# EAGLE board alphanewt_v0.7 (EAGLE 8.2.2)
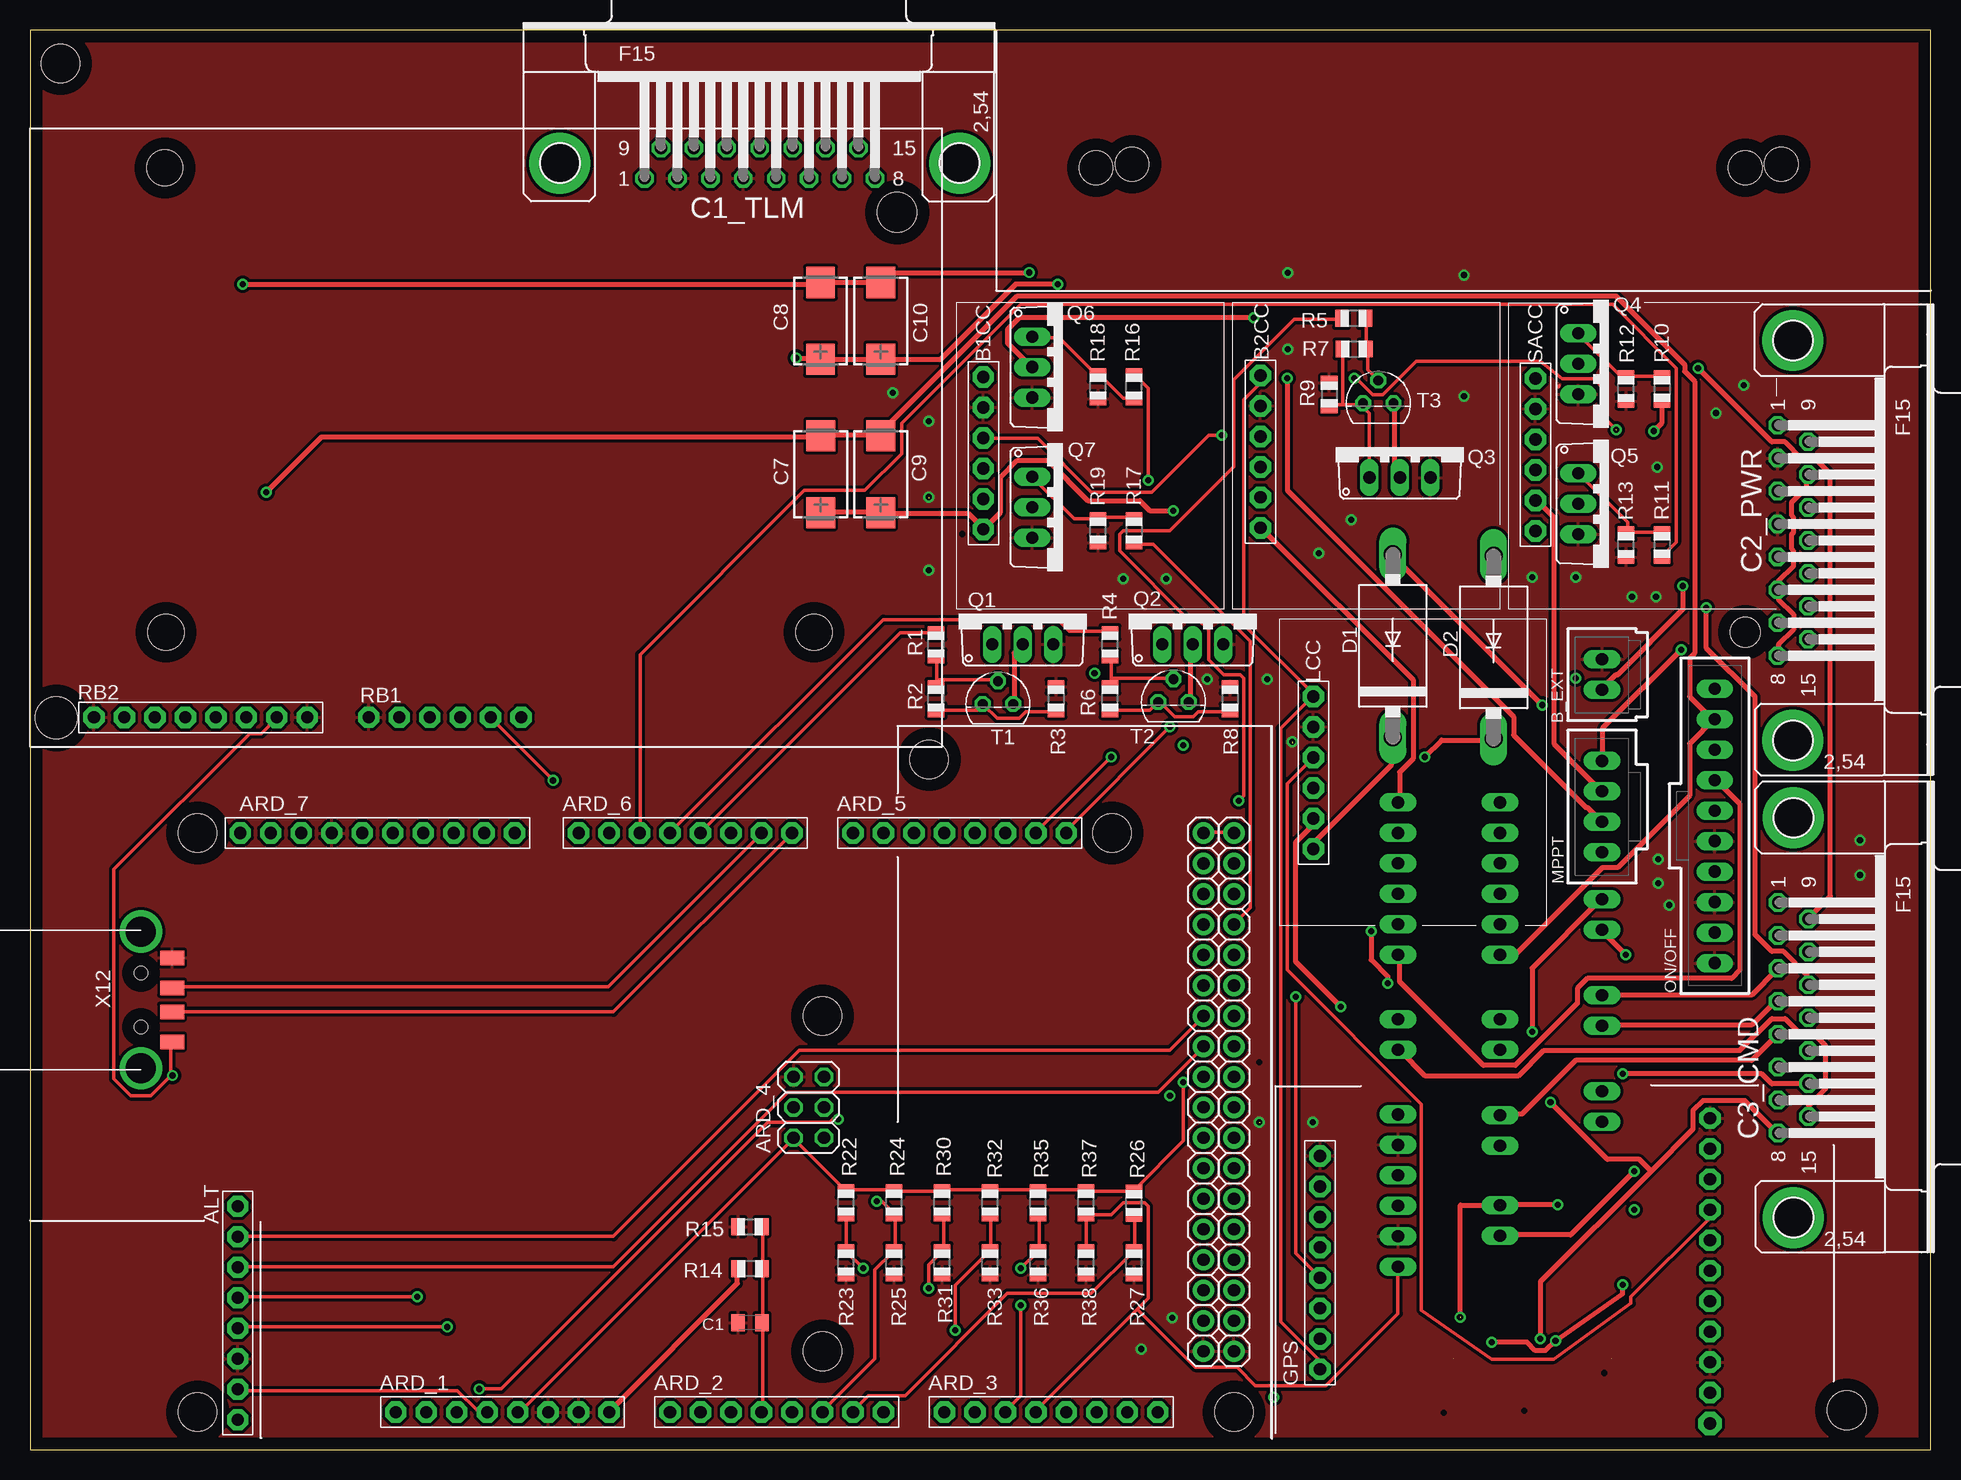
[diagram p0: board, top side]
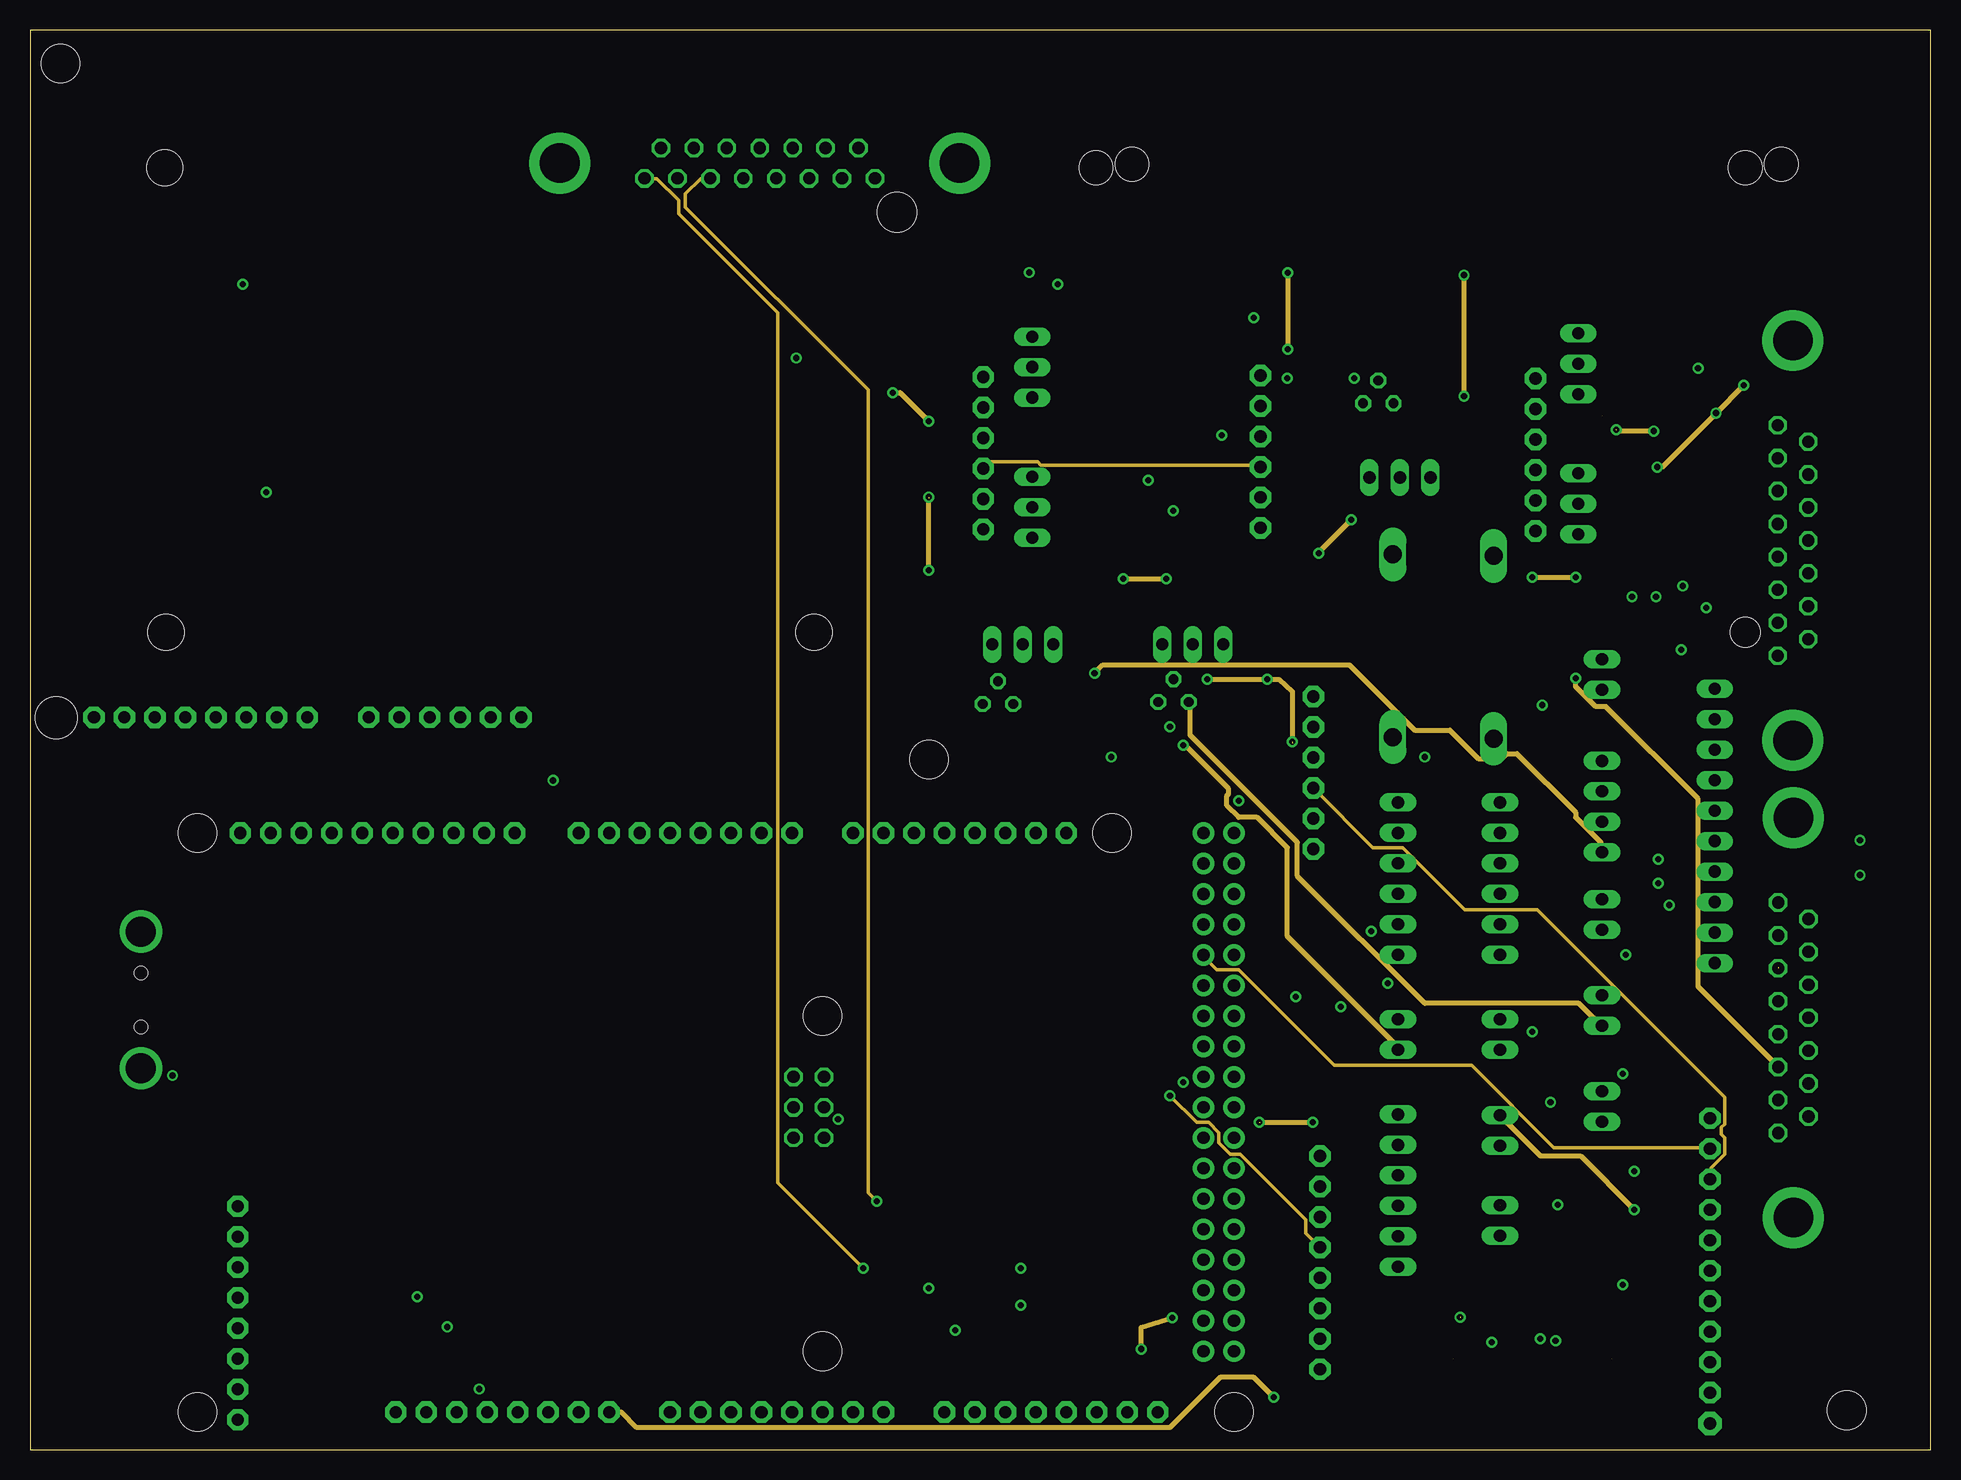
[diagram p1: board, inner layer Route2]
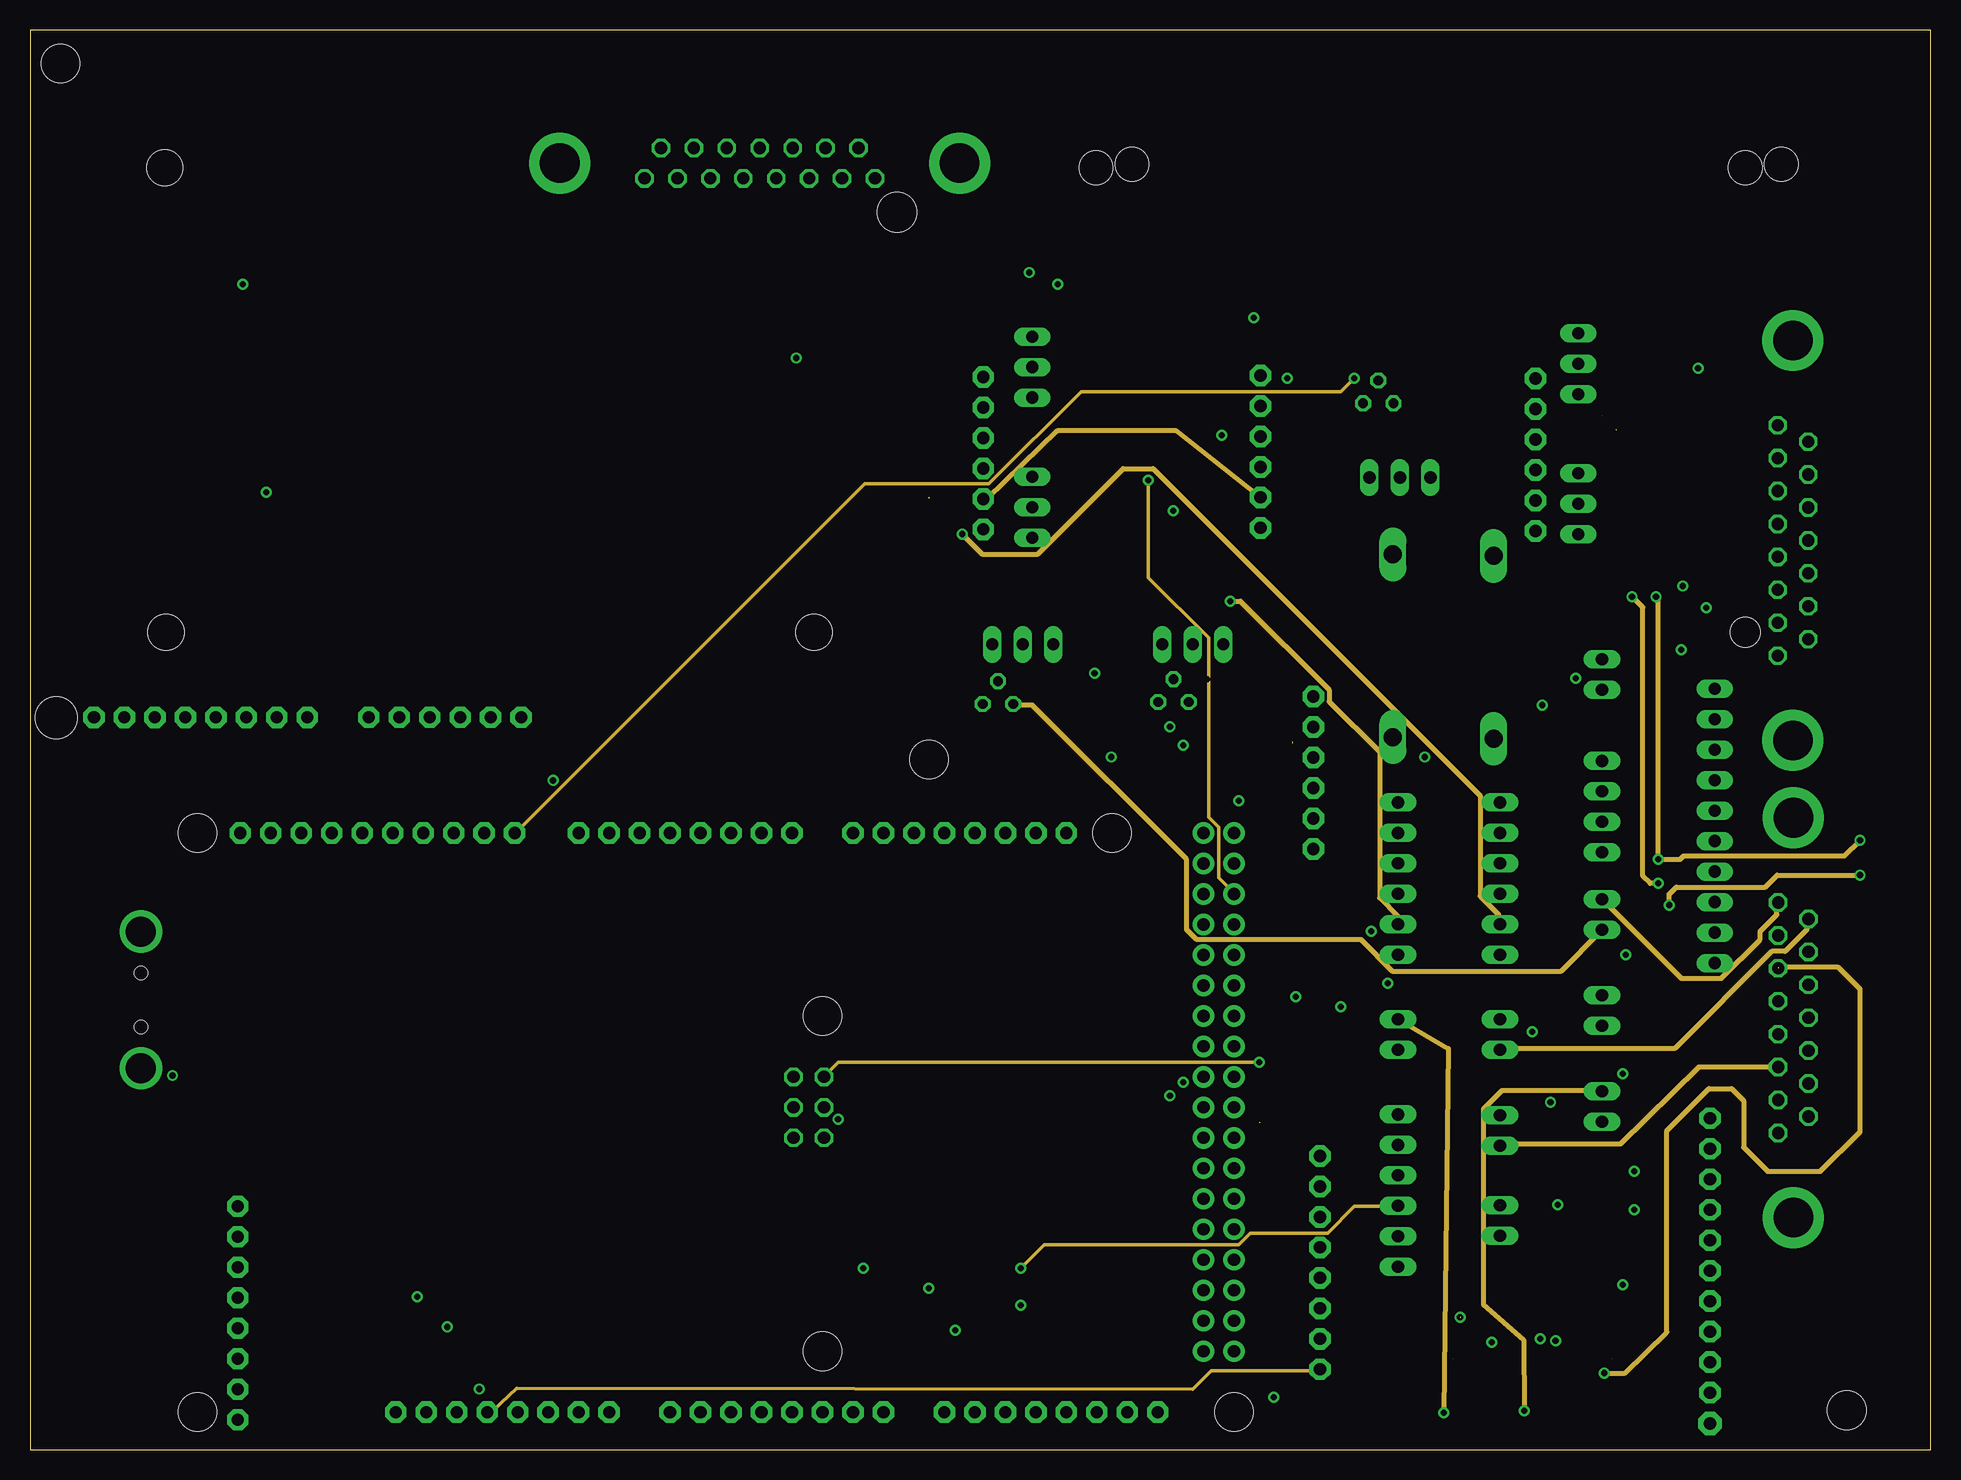
[diagram p2: board, inner layer Route15]
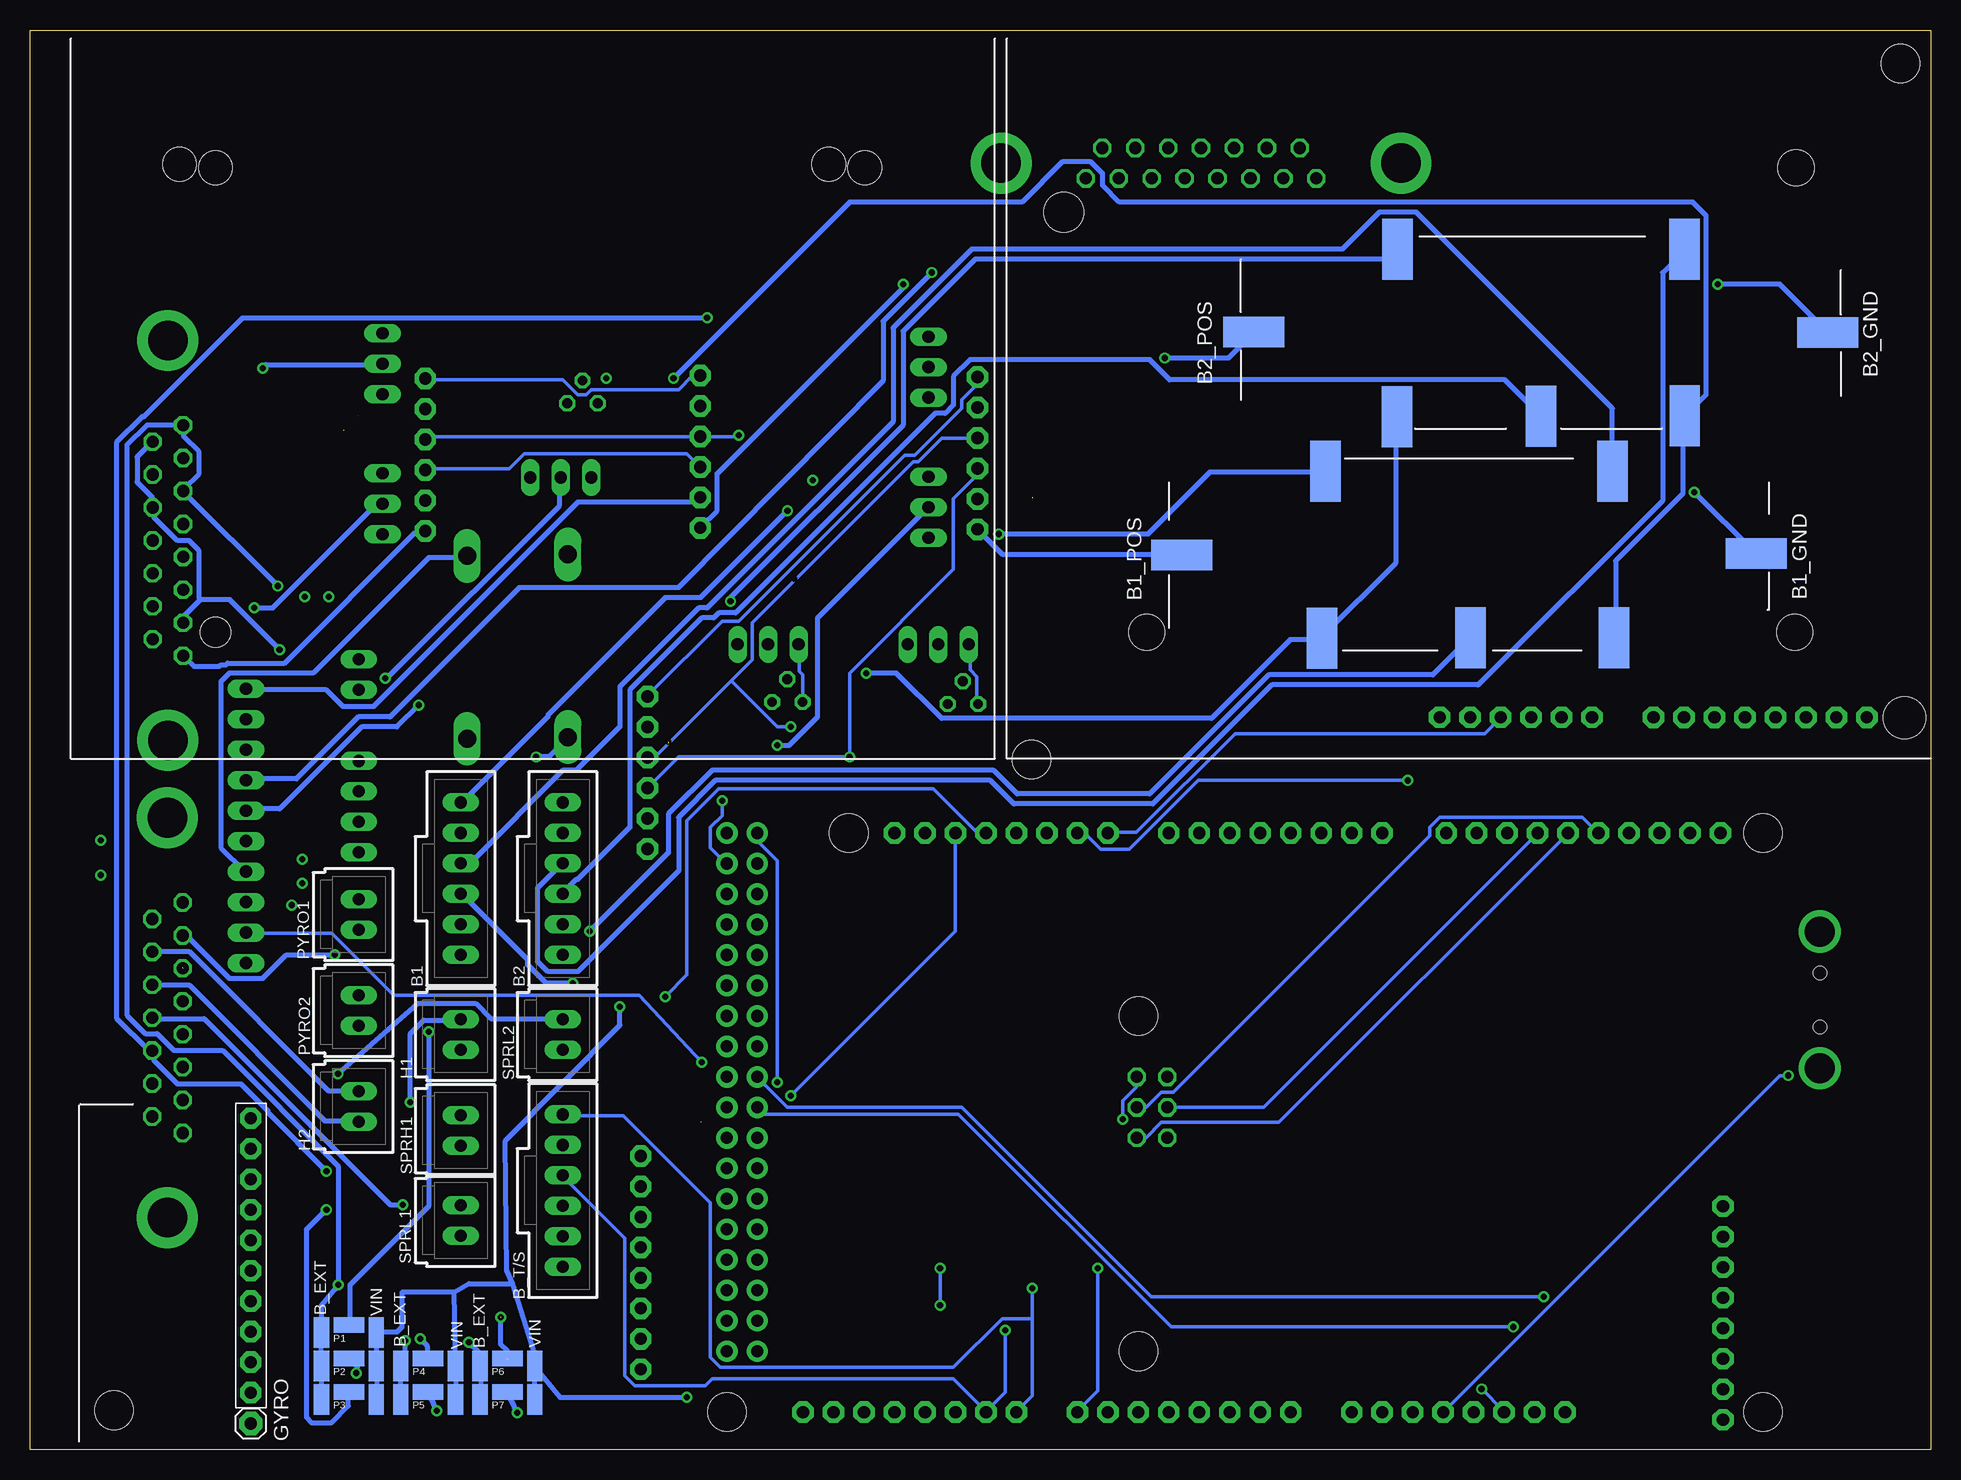
[diagram p3: board, bottom side, seen from below]

Size 158.4 x 118.32 mm. Coordinates in mm from the lower left corner, seen from the top.
Outline: 0,0 158.4,0 158.4,118.32 0,118.32 0,0
Copper layers ((1*2)+(15*16)): Top 0.035mm / dielectric 0.2mm / Route2 0.035mm / dielectric 0.2mm / Route15 0.035mm / dielectric 0.2mm / Bottom 0.035mm
Design rules "default *": minimum track width 6mil, minimum drill 0.35mm, track to track 6mil, track to pad 6mil, pad to pad 6mil, via to via 6mil, smd to smd 6mil, copper to edge 40mil, drill to drill 6mil, minimum pad ring 10mil, minimum via ring 8mil, stop-mask expansion 4mil, vias tented up to drill 0mil, thermal gap 10mil
Net classes: 0 default: width 0.305 mm, drill 0.508 mm, clearance 0.254 mm; 1 PWR: width 0.406 mm, drill 0.508 mm, clearance 0.305 mm
Holes 3.2 mm at 151.4,3.3 13.97,3.14 100.33,3.14 66.04,8.22 66.04,36.16 90.17,51.4 13.97,51.4 2.54,115.53 74.93,57.54
Holes 3.5 mm at 2.18,61
Holes 3.3 mm at 72.25,103.14
Holes 3 mm at 11.34,68.13 65.34,68.13 11.24,106.83
Holes 2.5 mm at 142.94,68.13
Holes 2.8 mm at 88.84,106.83 142.94,106.83 91.84,107.13 145.94,107.13

## Footprints (pad centres in the part's own frame; a part is rotated, then mirrored left to right if it is on the bottom)
1X08-BIG = drill 1.016 pad 1.778 octagon: 1 -8.89,0; 2 -6.35,0; 3 -3.81,0; 4 -1.27,0; 5 1.27,0; 6 3.81,0; 7 6.35,0; 8 8.89,0
2X03 = drill 1.016 octagon: 1 -2.54,-1.27; 2 -2.54,1.27; 3 0,-1.27; 4 0,1.27; 5 2.54,-1.27; 6 2.54,1.27
1X10-BIG = drill 1.016 pad 1.778 octagon: 1 -11.43,0; 2 -8.89,0; 3 -6.35,0; 4 -3.81,0; 5 -1.27,0; 6 1.27,0; 7 3.81,0; 8 6.35,0; 9 8.89,0; 10 11.43,0
1X18-BIG = drill 1.016 pad 1.778: 1 -21.59,0; 2 -19.05,0; 3 -16.51,0; 4 -13.97,0; 5 -11.43,0; 6 -8.89,0; 7 -6.35,0; 8 -3.81,0; 9 -1.27,0; 10 1.27,0; 11 3.81,0; 12 6.35,0; 13 8.89,0; 14 11.43,0; 15 13.97,0; 16 16.51,0; 17 19.05,0; 18 21.59,0
70543-06 = drill 1.016 long: 1 -6.35,0; 2 -3.81,0; 3 -1.27,0; 4 1.27,0; 5 3.81,0; 6 6.35,0
SMD2,54-5,08 = smd 2.54 x 5.08: 1 0,0
1X06-BIG = drill 1.016 pad 1.778 octagon: 1 -6.35,0; 2 -3.81,0; 3 -1.27,0; 4 1.27,0; 5 3.81,0; 6 6.35,0
70543-02 = drill 1.016 long: 1 -1.27,0; 2 1.27,0
C0805K = smd 1.1 x 1.4: 1 -1,0; 2 1,0
F15HP = drill 1.016 octagon: 1 -9.601,-1.27; 2 -6.858,-1.27; 3 -4.115,-1.27; 4 -1.372,-1.27; 5 1.372,-1.27; 6 4.115,-1.27; 7 6.858,-1.27; 8 9.601,-1.27; 9 -8.23,1.27; 10 -5.486,1.27; 11 -2.743,1.27; 12 0,1.27; 13 2.743,1.27; 14 5.486,1.27; 15 8.23,1.27 | drill 3.302 pad 5.08: G1 -16.662,0; G2 16.662,0
CT7343 = smd 2.6 x 2.4: + 3.2,0; - -3.2,0
DO201-15 = drill 1.499 long: A 7.62,0; C -7.62,0
1X01 = drill 1.016 pad 1.93 octagon: 1 0,0
70543-04 = drill 1.016 long: 1 -3.81,0; 2 -1.27,0; 3 1.27,0; 4 3.81,0
70543-10 = drill 1.016 long: 1 -11.43,0; 2 -8.89,0; 3 -6.35,0; 4 -3.81,0; 5 -1.27,0; 6 1.27,0; 7 3.81,0; 8 6.35,0; 9 8.89,0; 10 11.43,0
SMD1,27-2,54 = smd 1.27 x 2.54: 1 0,0
TO220AV = drill 1.016 long: B -2.54,-2.54; C 0,-2.54; E 2.54,-2.54
R0805 = smd 1.1 x 1.4: 1 -1,0; 2 1,0
1X06-CLEANBIG = drill 1.016 pad 1.778 octagon: 1 -6.35,0; 2 -3.81,0; 3 -1.27,0; 4 1.27,0; 5 3.81,0; 6 6.35,0
TO92 = drill 0.813 octagon: 1 1.27,0; 2 0,1.905; 3 -1.27,0
MOLEX_480371000 = smd 1.2 x 2: 1 3.5,2.6; 2 1,2.6; 3 -1,2.6; 4 -3.5,2.6 | drill 2.5: M1 -5.7,0; M2 5.7,0 | hole 1.1: -2.25,0; 2.25,0

## Placement (x,y rotation side)
ALT  [1X08-BIG]  17.31,11.4 90 top
ARD_1  [1X08-BIG]  39.37,3.14 0 top
ARD_2  [1X08-BIG]  62.23,3.14 0 top
ARD_3  [1X08-BIG]  85.09,3.14 0 top
ARD_4  [2X03]  64.9,28.54 90 top
ARD_5  [1X08-BIG]  77.47,51.4 0 top
ARD_6  [1X08-BIG]  54.61,51.4 0 top
ARD_7  PINHD-1X10  [1X10-BIG]  28.96,51.4 0 top
ARD_8  [1X18-BIG]  97.79,29.81 270 top
ARD_9  [1X18-BIG]  100.33,29.81 270 top
B1  C-GRID-06-70543  [70543-06]  122.5,47.6 270 bottom
B1_CELL_1  [SMD2,54-5,08]  50.44,81.54 0 bottom
B1_CELL_2  [SMD2,54-5,08]  38.37,67.66 0 bottom
B1_CELL_3  [SMD2,54-5,08]  26.53,81.56 0 bottom
B1_GND  [SMD2,54-5,08]  14.55,74.7 270 bottom
B1_IN_NEG  [SMD2,54-5,08]  26.4,67.69 0 bottom
B1_IN_POS  [SMD2,54-5,08]  50.72,67.64 0 bottom
B1_POS  [SMD2,54-5,08]  62.42,74.57 270 bottom
B1CC  [1X06-BIG]  79.44,83.05 270 top
B2  C-GRID-06-70543  [70543-06]  114,47.6 270 bottom
B2_CELL_1  [SMD2,54-5,08]  44.44,100.04 0 bottom
B2_CELL_2  [SMD2,54-5,08]  32.48,86.14 0 bottom
B2_GND  [SMD2,54-5,08]  8.58,93.11 270 bottom
B2_IN_NEG  [SMD2,54-5,08]  20.5,86.18 0 bottom
B2_IN_POS  [SMD2,54-5,08]  44.48,86.1 0 bottom
B2_POS  [SMD2,54-5,08]  56.42,93.14 270 bottom
B2CC  [1X06-BIG]  102.54,83.18 270 top
B3_CELL_3  [SMD2,54-5,08]  20.51,100.04 0 bottom
B_EXT  C-GRID-02-70543  [70543-02]  131,64.6 90 top
B_T/S  C-GRID-06-70543  [70543-06]  114,21.6 270 bottom
C1  4.7uF  [C0805K]  60,10.6 180 top
C1_TLM  [F15HP]  60.81,107.22 0 top
C2_PWR  [F15HP]  146.91,75.78 270 top
C3_CMD  [F15HP]  146.95,36.01 270 top
C7  330uF  [CT7343]  65.9,81.3 270 top
C8  330uF  [CT7343]  65.87,94.08 270 top
C9  330uF  [CT7343]  70.9,81.3 270 top
C10  330uF  [CT7343]  70.9,94.08 270 top
D1  1N5400  [DO201-15]  113.57,67 90 top
D2  1N5400  [DO201-15]  121.97,66.88 90 top
GPS  [1X08-BIG]  107.5,15.6 90 top
GYRO  PINHD-1X10  [1X10-BIG]  140,16.2 270 bottom
GYRO_2  [1X01]  140,2.2 180 bottom
H1  C-GRID-02-70543  [70543-02]  122.5,34.6 270 bottom
H2  C-GRID-02-70543  [70543-02]  131,28.6 270 bottom
LCC  [1X06-BIG]  106.95,56.43 270 top
MPPT  C-GRID-04-70543  [70543-04]  131,53.6 90 top
ON/OFF  C-GRID-10-70543  [70543-10]  140.4,52 270 top
PEXT1  [SMD1,27-2,54]  134.11,9.77 0 bottom
PEXT2  [SMD1,27-2,54]  134.11,6.97 0 bottom
PEXT3  [SMD1,27-2,54]  134.11,4.18 0 bottom
PEXT4  [SMD1,27-2,54]  127.51,6.97 0 bottom
PEXT5  [SMD1,27-2,54]  127.51,4.18 180 bottom
PEXT6  [SMD1,27-2,54]  120.9,6.97 0 bottom
PEXT7  [SMD1,27-2,54]  120.9,4.18 0 bottom
PO1  [SMD1,27-2,54]  131.83,10.4 90 bottom
PO2  [SMD1,27-2,54]  131.83,7.61 270 bottom
PO3  [SMD1,27-2,54]  131.83,4.81 270 bottom
PO4  [SMD1,27-2,54]  125.22,7.61 270 bottom
PO5  [SMD1,27-2,54]  125.22,4.81 270 bottom
PO6  [SMD1,27-2,54]  118.62,7.61 270 bottom
PO7  [SMD1,27-2,54]  118.62,4.81 270 bottom
PVIN1  [SMD1,27-2,54]  129.54,9.77 180 bottom
PVIN2  [SMD1,27-2,54]  129.54,6.97 0 bottom
PVIN3  [SMD1,27-2,54]  129.54,4.18 0 bottom
PVIN4  [SMD1,27-2,54]  122.94,6.97 0 bottom
PVIN5  [SMD1,27-2,54]  122.94,4.18 180 bottom
PVIN6  [SMD1,27-2,54]  116.33,6.97 0 bottom
PVIN7  [SMD1,27-2,54]  116.33,4.18 0 bottom
PYRO1  C-GRID-02-70543  [70543-02]  131,44.6 270 bottom
PYRO2  C-GRID-02-70543  [70543-02]  131,36.6 270 bottom
Q1  TIP41C  [TO220AV]  82.72,69.66 0 top
Q2  TIP41C  [TO220AV]  96.9,69.66 0 top
Q3  TIP41C  [TO220AV]  114.16,83.56 0 top
Q4  TIP41C  [TO220AV]  131.56,90.51 270 top
Q5  TIP41C  [TO220AV]  131.56,78.83 270 top
Q6  TIP41C  [TO220AV]  86.06,90.23 270 top
Q7  TIP41C  [TO220AV]  86.06,78.55 270 top
R1  150  [R0805]  75.5,67.1 90 top
R2  150  [R0805]  75.5,62.6 90 top
R3  150  [R0805]  85.5,62.6 270 top
R4  150  [R0805]  90,67.1 90 top
R5  150  [R0805]  110.3,94.29 180 top
R6  150  [R0805]  90,62.6 90 top
R7  150  [R0805]  110.34,91.74 0 top
R8  150  [R0805]  100,62.6 270 top
R9  150  [R0805]  108.28,87.94 270 top
R10  120  [R0805]  136,88.4 270 top
R11  120  [R0805]  136,75.4 270 top
R12  10k  [R0805]  133,88.4 90 top
R13  10k  [R0805]  133,75.4 90 top
R14  1.7M  [R0805]  60,15.1 180 top
R15  470k  [R0805]  60,18.6 0 top
R16  120  [R0805]  92,88.6 90 top
R17  120  [R0805]  92,76.6 270 top
R18  10k  [R0805]  89,88.6 90 top
R19  10k  [R0805]  89,76.6 90 top
R22  6800  [R0805]  68,20.6 90 top
R23  120000  [R0805]  68,15.6 90 top
R24  6800  [R0805]  72,20.6 90 top
R25  120000  [R0805]  72,15.6 90 top
R26  6800  [R0805]  92,20.56 90 top
R27  120000  [R0805]  92,15.6 90 top
R30  6800  [R0805]  76,20.6 90 top
R31  120000  [R0805]  76,15.6 90 top
R32  6800  [R0805]  80,20.6 90 top
R33  120000  [R0805]  80,15.6 90 top
R35  6800  [R0805]  84,20.6 90 top
R36  120000  [R0805]  84,15.6 90 top
R37  6800  [R0805]  88,20.6 90 top
R38  120000  [R0805]  88,15.6 90 top
RB1  [1X06-CLEANBIG]  34.58,61.05 180 top
RB2  [1X08-BIG]  14.22,61.04 180 top
SACC  [1X06-BIG]  125.46,82.93 270 top
SPRH1  C-GRID-02-70543  [70543-02]  122.5,26.6 270 bottom
SPRL1  C-GRID-02-70543  [70543-02]  122.5,19.1 270 bottom
SPRL2  C-GRID-02-70543  [70543-02]  114,34.6 270 bottom
T1  2N3904  [TO92]  80.66,62.15 0 top
T2  2N3904  [TO92]  95.29,62.31 0 top
T3  2N3904  [TO92]  112.36,87.21 0 top
X12  USB-A  [MOLEX_480371000]  9.24,37.49 270 top

## Library data of the parts
ALT ARD_1-ARD_3 ARD_5-ARD_9 B1CC B2CC GPS GYRO GYRO_2 LCC RB1 RB2 SACC = adafruit; OC_NEWARK: unknown
ARD_4 = pinhead; OC_NEWARK: unknown
B1 B2 B_T/S = con-molex; MF: MOLEX; MPN: 70543-0005; OC_FARNELL: unknown; OC_NEWARK: 59H2647
B1_CELL_1-B1_CELL_3 B1_GND B1_IN_NEG B1_IN_POS B1_POS B2_CELL_1 B2_CELL_2 B2_GND B2_IN_NEG B2_IN_POS B2_POS B3_CELL_3 PEXT1-PEXT7 PO1-PO7 PVIN1-PVIN7 = wirepad; OC_NEWARK: unknown
B_EXT H1 H2 PYRO1 PYRO2 SPRH1 SPRL1 SPRL2 = con-molex; MF: MOLEX; MPN: 70543-0001; OC_FARNELL: unknown; OC_NEWARK: 59H2645
C1 = adafruit; MPN: C2012X6S1H475K125AC; OC_NEWARK: 95Y0059
C1_TLM C2_PWR C3_CMD = adafruit; MPN: 5504F1-15S-02A-03; OC_NEWARK: 18T0705
C7-C10 = adafruit; MPN: TCN4337M020R0100; OC_NEWARK: 13AC9461
D1 D2 = diode; MPN: 1N5400-E3/54; OC_NEWARK: 05R5997
MPPT = con-molex; MF: MOLEX; MPN: 70543-0038; OC_FARNELL: unknown; OC_NEWARK: 59H2665
ON/OFF = con-molex; MF: MOLEX; MPN: 70543-0009; OC_FARNELL: unknown; OC_NEWARK: 59H2651
Q1-Q7 = transistor-power; MF: FAIRCHILD SEMICONDUCTOR; MPN: TIP41C; OC_NEWARK: 58K2429
R1-R19 R22-R27 R30-R33 R35-R38 = adafruit; MF: VISHAY/DALE; MPN: CRCW120633R2FKEA; OC_NEWARK: 42K4999
T1-T3 = transistor; MF: NTE ELECTRONICS; MPN: 2N3904; OC_NEWARK: 33C8259
X12 = adafruit; MPN: UE27-AC54-10H; OC_NEWARK: 01M3183

## Nets
5V_OUT: RB2.3
+3.3V: ALT.2 ARD_1.4 B1CC.1 B2CC.1 GPS.1 LCC.1 SACC.1
+5V: ARD_1.5 ARD_4.2 ARD_8.1 ARD_9.1 R22.2 R24.2 R26.2 R30.2 R32.2 R35.2 R37.2 RB2.2 X12.1
A0: ARD_2.1
A1: ARD_2.2
A2: ARD_2.3
A4: ARD_2.5
ALT_CS: ALT.7 ARD_8.7
ALT_MISO: ALT.5 ARD_8.9
ALT_MOSI: ALT.6 ARD_8.8
ALT_SCK: ALT.4 ARD_8.10
ALT_VIN: ALT.1
AREF: ARD_7.3
B1_CHRG_IN [PWR]: B1.1 B1_POS.1 B1CC.6 C7.+ C9.+
B1_CHRG_OUT [PWR]: B1CC.5 B2CC.5 ON/OFF.1
B1_GND [PWR]: B1.6 B1_GND.1 C7.- C9.- ON/OFF.2
B1_TO_LOAD [PWR]: D1.A ON/OFF.5
B2_CHRG_IN [PWR]: B2.1 B2_POS.1 B2CC.6 C8.+ C10.+
B2_CHRG_OUT [PWR]: ON/OFF.3
B2_GND [PWR]: B2.6 B2_GND.1 C8.- C10.- ON/OFF.4
B2_TO_LOAD [PWR]: D2.A ON/OFF.7
BATT_1_TS1: ARD_3.1 B_T/S.1 R30.1 R31.2
BATT_1_TS2: ARD_3.2 B_T/S.3 R32.1 R33.2
BATT_2_TS1: ARD_3.3 B_T/S.4 R35.1 R36.2
BATT_2_TS2: ARD_3.4 B_T/S.6 R37.1 R38.2
BATT_CHRG_PWR [PWR]: B1_IN_POS.1 B2_IN_POS.1 MPPT.1
BATT_CHRG_PWR_RTN [PWR]: B1_IN_NEG.1 B2_IN_NEG.1 MPPT.2
BATT_EXT_PWR [PWR]: B_EXT.1 C2_PWR.1 C2_PWR.3 PEXT1.1 PEXT2.1 PEXT3.1 PEXT4.1 PEXT5.1 PEXT6.1 PEXT7.1
CANRX: ARD_3.7
CANTX: ARD_3.8
CHIP_SEL: ARD_7.8
CTS: RB1.5
CUTDOWN_1_FIRE: ARD_6.5 R1.2
CUTDOWN_2_FIRE: ARD_6.4 R4.2
D2: ARD_6.6
D6: ARD_6.2
D7: ARD_6.1
D9: ARD_7.9
D22: ARD_8.2
D24: ARD_8.3
D26: ARD_8.4
D29: ARD_9.5
D30: ARD_8.6
D31: ARD_9.6
D33: ARD_9.7
D35: ARD_9.8
D37: ARD_9.9
D39: ARD_9.10
D40: ARD_8.11
D41: ARD_9.11
D42: ARD_8.12
D43: ARD_9.12
D44: ARD_8.13
D45: ARD_9.13
D46: ARD_8.14
D47: ARD_9.14
D48: ARD_8.15
D49: ARD_9.15
D50: ARD_8.16
D51: ARD_9.16
D52: ARD_8.17
D53: ARD_9.17
DAC0: ARD_3.5
DAC1: ARD_3.6
FLT_CMP_TEMP: ARD_2.7 R26.1 R27.2
GND: ALT.3 ARD_1.6 ARD_1.7 ARD_4.6 ARD_7.4 ARD_8.18 ARD_9.18 B1CC.2 B2CC.2 B_EXT.2 B_T/S.2 B_T/S.5 C1.2 C1_TLM.2 C1_TLM.4 C2_PWR.2 C2_PWR.4 GPS.8 GYRO.1 GYRO.9 LCC.2 ON/OFF.6 ON/OFF.8 ON/OFF.10 Q1.E Q2.E Q3.E Q4.E Q5.E Q6.E Q7.E R3.1 R8.1 R9.1 R12.1 R13.1 R15.1 R18.1 R19.1 R23.1 R25.1 R27.1 R31.1 R33.1 R36.1 R38.1 RB1.6 RB2.1 RB2.8 SACC.2 X12.4
GYRO_CIN: GYRO.8
GYRO_COUT: GYRO.7
GYRO_ESC: GYRO.6
GYRO_ESD: GYRO.5
GYRO_FSYNC: GYRO.10
GYRO_INT: GYRO_2.1
GYRO_PWR: ARD_8.5 GYRO.2
HEATER_1_PWR [PWR]: C3_CMD.8 H1.1 PO4.1
HEATER_1_PWR_RTN [PWR]: C3_CMD.9 H1.2 Q4.C
HEATER_2_PWR [PWR]: C3_CMD.10 H2.1 PO5.1
HEATER_2_PWR_RTN [PWR]: C3_CMD.11 H2.2 Q5.C
HEATER_CONTROL_1: ARD_7.10 R10.2
HEATER_CONTROL_2: ARD_6.3 R11.2
IOREF: ARD_1.2
LI_ION: RB2.7
LOAD_IN [PWR]: D1.C D2.C LCC.6
MISO: ARD_4.1 ARD_7.6
MOSI: ARD_4.4 ARD_7.7
N$1: B1.2
N$2: B2.2
N$12: C1_TLM.9
N$13: C1_TLM.10
N$15: R4.1 R6.2 T2.2
N$16: R1.1 R2.2 T1.2
N$18: Q4.B R10.1 R12.2
N$19: Q2.B R6.1 R8.2 T2.3
N$20: C1_TLM.11
N$21: C1_TLM.12
N$22: Q5.B R11.1 R13.2
N$23: Q1.B R2.1 R3.2 T1.3
N$24: Q6.B R16.1 R18.2
N$25: C1_TLM.13
N$26: R5.1 R7.2 T3.2
N$27: Q3.B R7.1 R9.2 T3.3
N$28: C1_TLM.14
N$29 [PWR]: B1.5 B1_CELL_1.1
N$30: C1_TLM.15
N$31: Q7.B R17.1 R19.2
N$33 [PWR]: B1.4 B1_CELL_2.1
N$34 [PWR]: B2.3 B3_CELL_3.1
N$35 [PWR]: B2.4 B2_CELL_2.1
N$36 [PWR]: B2.5 B2_CELL_1.1
N$37 [PWR]: B1.3 B1_CELL_3.1
N$40: C1_TLM.5
N$41: C1_TLM.6
N$42: C1_TLM.7
N$43: C1_TLM.8
N$47: C2_PWR.12
N$48: C2_PWR.13
N$49: C2_PWR.14
N$50: C2_PWR.15
N$55: C2_PWR.5
N$72 [PWR]: C3_CMD.7
NET_AV: RB2.5
ON_OFF: RB2.6
PYRO_1_PWR [PWR]: C3_CMD.1 PO1.1 PYRO1.1
PYRO_1_PWR_RTN [PWR]: C3_CMD.2 PYRO1.2 Q1.C T1.1
PYRO_2_PWR [PWR]: C3_CMD.3 PO2.1 PYRO2.1
PYRO_2_PWR_RTN [PWR]: C3_CMD.4 PYRO2.2 Q2.C T2.1
RESET: ARD_1.3 ARD_4.5 ON/OFF.9
RF_IN: GPS.2
RI: RB2.4
RTS: RB1.1
RX0: ARD_6.8 X12.2
RX1: ARD_5.6 GPS.5
RX2: ARD_5.4
RX3: ARD_5.2 RB1.2
RXB: GPS.7
S/A_PWR_IN [PWR]: C2_PWR.6 C2_PWR.8 C2_PWR.10 SACC.6
S/A_PWR_OUT [PWR]: MPPT.3 SACC.5
S/A_PWR_RTN [PWR]: C2_PWR.7 C2_PWR.9 C2_PWR.11 MPPT.4
SCK: ARD_4.3 ARD_7.5
SCL: ARD_5.8 B1CC.3 B2CC.3 GYRO.4 LCC.3 SACC.3
SCL1: ARD_7.1
SDA: ARD_5.7 B1CC.4 B2CC.4 GYRO.3 LCC.4 SACC.4
SDA1: ARD_7.2
SPARE_1_PWR [PWR]: C3_CMD.12 PO6.1 SPRL1.1
SPARE_1_PWR_RTN [PWR]: C3_CMD.13 Q6.C SPRL1.2
SPARE_2_PWR [PWR]: C3_CMD.14 PO7.1 SPRL2.1
SPARE_2_PWR_RTN [PWR]: C3_CMD.15 Q7.C SPRL2.2
SPARE_HIGH_1_CONTROL: ARD_9.2 R5.2
SPARE_HIGH_1_PWR [PWR]: C3_CMD.5 PO3.1 SPRH1.1
SPARE_HIGH_1_PWR_RTN [PWR]: C3_CMD.6 Q3.C SPRH1.2 T3.1
SPARE_LOW_1_CONTROL: ARD_9.3 R16.2
SPARE_LOW_2_CONTROL: ARD_9.4 R17.2
TEMP_EXT_1: ARD_2.8 C1_TLM.1 R22.1 R23.2
TEMP_EXT_2: ARD_2.6 C1_TLM.3 R24.1 R25.2
TX0: ARD_6.7 X12.3
TX1: ARD_5.5 GPS.4
TX2: ARD_5.3
TX3: ARD_5.1 RB1.3
TXB: GPS.6
UNKNOWN: ARD_1.1
VBAT: GPS.3
VCC_RB: RB1.4
VIN [PWR]: ARD_1.8 LCC.5 PVIN1.1 PVIN2.1 PVIN3.1 PVIN4.1 PVIN5.1 PVIN6.1 PVIN7.1 R14.2
VIN_VOLTAGE_TLM: ARD_2.4 C1.1 R14.1 R15.2

## Tracks (layer width: path | path; a pad name or v marks a point on that pad's centre or on a via)
+3.3V
  Top 0.305: ARD_1.4 38,3.25 37.3,3.25 35.62,4.93 17.32,4.93 ALT.2 | GPS.1 107.43,6.75 107.43,7.44 104.22,10.66 104.22,60.11 106.87,62.77 LCC.1 107.01,62.91 101.14,68.77 101.14,87.49 102.54,88.89 102.54,89.45 B2CC.1
  Route15 0.305: ARD_1.4 38.14,3.25 38.58,3.25 40.57,5.15 96.89,5.05 98.45,6.61 107.43,6.61 GPS.1
  Bottom 0.305: B2CC.1 102.68,89.45 103.24,89.45 104.36,88.33 111.62,88.33 112.04,87.91 112.74,87.91 114,89.17 125.45,89.17 SACC.1 | B1CC.1 79.49,89.31 79.49,88.75 80.75,87.49 80.75,86.79 84.66,82.88 85.5,82.88 99.33,69.05 100.72,69.05 106.87,62.91 LCC.1
+5V  (via drill 0.51)
  Top 0.305: 11.73,31.19 11.73,33.99 X12.1 | 11.73,31.19 10.06,29.52 8.38,29.52 6.99,30.92 6.99,48.38 18.3,59.69 19.28,59.69 20.54,60.95 RB2.2 | ARD_8.1 97.79,51.45 100.31,51.45 ARD_9.1 | ARD_1.5 40.65,3.25 40.93,3.25 63.56,25.89 ARD_4.2 63.7,25.89 67.89,21.7 R22.2 68.03,21.7 71.94,21.7 R24.2 72.08,21.55 75.86,21.55 R30.2 76.14,21.7 79.91,21.7 R32.2 80.05,21.7 83.96,21.7 R35.2 84.1,21.7 87.87,21.7 R37.2 88.15,21.55 91.92,21.55 R26.2 92.06,21.7 96.11,25.75 v96.11,30.64 | v11.87,31.19 11.73,31.19
  Bottom 0.305: ARD_8.1 97.79,50.75 96.11,49.08 v96.11,30.64 | v11.87,31.19 12.57,31.19 40.51,3.25 ARD_1.5
ALT_CS
  Top 0.305: ALT.7 17.32,17.78 48.62,17.78 64.12,33.29 95,33.29 97.79,36.08 ARD_8.7
ALT_MISO  (via drill 0.51)
  Top 0.305: v32.27,12.75 17.32,12.75 ALT.5
  Bottom 0.305: v32.27,12.75 64.96,12.75 80.75,28.54 95.28,28.54 97.79,31.05 ARD_8.9
ALT_MOSI
  Top 0.305: ALT.6 17.32,15.27 48.62,15.27 63.14,29.8 94.02,29.8 97.79,33.57 ARD_8.8
ALT_SCK  (via drill 0.51)
  Top 0.305: v34.78,10.24 17.32,10.24 ALT.4
  Bottom 0.305: v34.78,10.24 63.28,10.24 81.03,27.98 97.23,27.98 ARD_8.10
B1_CHRG_IN  (via drill 0.51)
  Top 0.406: C7.+ 65.94,78.13 70.83,78.13 C9.+ 70.97,77.99 78.23,77.99 79.35,76.88 B1CC.6 79.49,76.74 80.89,78.13 80.89,81.07 82.28,82.46 84.8,82.46 88.15,79.11 92.48,79.11 93.32,78.27 v95.28,78.27
  Bottom 0.406: v95.28,78.27 102.54,71.01 105.47,71.01 115.25,61.23 115.25,61.09 122.38,53.97 B1.1 | B1_POS.1 62.45,74.64 77.39,74.64 79.35,76.6 B1CC.6
B1_CHRG_OUT
  Route15 0.406: B1CC.5 79.49,79.25 79.77,79.25 85.62,84.9 95.53,84.9 102.54,79.39 B2CC.5
  Bottom 0.406: ON/OFF.1 140.4,63.33 133.69,63.33 132.3,61.93 129.78,61.93 112.74,78.97 102.96,78.97 102.68,79.25 B2CC.5
B1_GND  (via drill 0.51)
  Top 0.406: B1.6 122.52,41.25 123.77,41.25 131.04,48.52 132.3,48.52 138.3,54.52 138.3,58.86 140.4,60.95 ON/OFF.2 140.12,60.95 138.3,62.77 138.3,65.98 138.72,66.4 138.72,89.03 137.88,89.87 137.88,90.43 132.16,96.16 82.28,96.16 70.83,84.7 C9.- 70.83,84.56 65.94,84.56 C7.- 65.8,84.42 24.31,84.42 v19.7,79.81
  Bottom 0.406: v19.7,79.81 14.67,74.78 B1_GND.1
B1_TO_LOAD  (via drill 0.51)
  Top 0.406: v126.01,62.07 113.58,74.5 D1.A
  Bottom 0.406: v126.01,62.07 127.83,60.25 130.76,60.25 137.6,53.41 140.4,53.41 ON/OFF.5
B2_CHRG_IN  (via drill 0.51)
  Top 0.406: v63.84,90.99 65.8,90.99 C8.+ 65.94,90.85 70.83,90.85 C10.+ 71.11,90.85 75.86,90.85 82.14,97.13 v85.64,97.13 | B2.1 114.14,53.97 114.14,56.48 115.25,57.6 115.25,64.16 102.68,76.74 B2CC.6
  Bottom 0.406: v63.84,90.99 58.53,90.99 56.44,93.08 B2_POS.1 | v85.64,97.13 85.64,96.85 101.14,81.35 101.14,78.27 102.54,76.88 B2CC.6
B2_GND  (via drill 0.51)
  Top 0.406: B2.6 114.14,41.11 114.14,39.02 121.12,32.03 123.77,32.03 128.94,37.2 128.94,38.46 129.78,39.3 141.8,39.3 142.49,40 142.49,53.83 140.54,55.78 ON/OFF.4 | v17.74,97.13 65.8,97.13 C8.- 65.94,97.27 70.83,97.27 C10.- 70.97,97.41 71.67,98.11 v83.26,98.11
  Bottom 0.406: v17.74,97.13 12.57,97.13 8.66,93.22 B2_GND.1 | v83.26,98.11 87.31,94.06 87.31,89.11 104.37,71.85 117.63,71.85 128.38,61.09 131.04,61.09 136.21,55.92 140.4,55.92 ON/OFF.4
B2_TO_LOAD
  Bottom 0.406: ON/OFF.7 140.54,48.24 142.49,50.19 142.49,64.02 141.8,64.72 134.81,64.72 125.17,74.36 122.1,74.36 D2.A
BATT_1_TS1  (via drill 0.51)
  Top 0.305: R30.1 76.14,19.6 76.14,16.67 R31.2 76,16.53 74.88,15.41 v74.88,13.45
  Bottom 0.305: 74.88,10.94 74.88,4.51 76.14,3.25 ARD_3.1 | 74.88,10.94 v74.88,13.45 | 74.88,10.94 77.39,10.94 81.44,6.89 100.86,6.89 101.7,7.72 101.7,20.58 108.97,27.84 114,27.84 B_T/S.1
BATT_1_TS2  (via drill 0.51)
  Top 0.305: R32.1 80.05,19.6 80.05,16.67 R33.2 79.91,16.53 77.11,13.73 v77.11,9.96
  Bottom 0.305: v77.11,9.96 77.11,4.79 78.65,3.25 ARD_3.2 78.79,3.25 81.44,5.91 101.56,5.91 102.12,5.35 107.99,5.35 108.83,6.19 108.83,17.64 114,22.81 B_T/S.3
BATT_2_TS1  (via drill 0.51)
  Top 0.305: R35.1 84.1,19.6 84.1,16.67 R36.2 83.96,16.53 v82.56,15.13 | v82.56,12.05 82.56,4.51 81.31,3.25 ARD_3.3
  Route15 0.305: v82.56,15.13 84.52,17.09 100.72,17.09 101.7,18.06 108.13,18.06 110.36,20.3 114,20.3 B_T/S.4
  Bottom 0.305: v82.56,12.05 v82.56,15.13
BATT_2_TS2
  Top 0.305: R38.2 88.01,16.67 R37.1 88.15,19.6 90.11,19.6 91.08,20.58 92.9,20.58 93.18,20.3 93.18,12.61 92.27,11.71 | 92.27,11.71 83.82,3.25 ARD_3.4 | 92.27,11.71 97.09,6.89 100.58,6.89 102.12,5.35 107.99,5.35 114,11.36 114,15.13 B_T/S.6
BATT_CHRG_PWR  (via drill 0.51)
  Route2 0.406: v88.71,64.72 89.41,65.42 109.94,65.42 115.39,59.97 118.33,59.97 120.7,57.6 122.66,57.6 123.08,58.02 123.91,58.02 128.8,53.13 128.8,52.71 130.9,50.61 130.9,49.91 MPPT.1
  Bottom 0.406: v88.71,64.72 86.19,64.72 82.42,60.95 59.93,60.95 53.37,67.52 50.85,67.52 B1_IN_POS.1 50.71,67.8 44.56,73.94 44.56,86.1 B2_IN_POS.1
BATT_CHRG_PWR_RTN  (via drill 0.51)
  Top 0.406: v104.78,89.31 104.78,79.95 123.64,61.09 123.64,59.55 129.64,53.55 129.78,53.55 130.9,52.43 MPPT.2
  Bottom 0.406: v104.78,89.31 90.11,103.98 75.72,103.98 72.36,107.33 69.99,107.33 69.01,106.35 69.01,105.38 67.61,103.98 19.84,103.98 18.72,102.86 18.72,87.91 20.4,86.24 B2_IN_NEG.1 20.68,86.1 20.68,79.67 26.26,74.08 26.26,67.8 B1_IN_NEG.1
BATT_EXT_PWR  (via drill 0.51)
  Top 0.406: v121.82,8.97 124.75,8.97 125.45,8.27 126.29,8.27 v127.13,9.11 132.72,12.99 v132.72,13.75 | v137.74,71.99 137.74,70.03 132.3,64.58 132.16,64.58 131.04,63.47 B_EXT.1
  Bottom 0.406: PEXT3.1 PEXT2.1 PEXT1.1 134.11,12.05 v132.72,13.75 132.72,23.65 142.35,33.29 146.41,33.29 147.8,34.69 148.78,34.69 150.32,36.22 150.32,83.72 148.64,85.4 145.71,85.4 C2_PWR.1 145.57,85.26 145.57,84.42 144.31,83.16 144.31,81.35 145.57,80.09 C2_PWR.3 145.57,79.81 v137.74,71.99 | PEXT7.1 120.84,4.22 120.84,6.87 PEXT6.1 120.98,7.15 120.98,8.13 v121.82,8.97 | PEXT5.1 127.55,4.22 127.55,6.87 PEXT4.1 127.41,7.15 127.13,7.43 v127.13,9.11
CUTDOWN_1_FIRE
  Top 0.305: R1.2 75.44,68.07 72.5,68.07 55.88,51.45 ARD_6.5
CUTDOWN_2_FIRE
  Top 0.305: R4.2 89.97,68.21 86.61,68.21 85.64,69.19 71.11,69.19 53.37,51.45 ARD_6.4
FLT_CMP_TEMP
  Top 0.305: R26.1 92.06,19.46 92.06,16.67 R27.2 91.92,16.53 88.43,13.03 81.44,13.03 72.92,4.51 69.85,4.51 68.59,3.25 ARD_2.7
GND  (via drill 0.51, 0.51 layers 1-2)  (3 unrouted)
  Top 0.305: Q4.E 129.08,87.91 129.08,87.89 | 127.41,88.61 127.43,88.68
  Route2 0.406: v92.6,8.4 92.6,10.2 v95.2,11 | 102.5,27.3 v106.9,27.3 | v74.9,73.3 74.9,79.3 75,79.4 | v71.9,88.1 72.5,88.1 74.8,85.8 | v104.8,98.1 v104.8,91.7 104.9,91.6 | v119.5,87.8 v119.5,97.9 | v142.8,88.7 v140.5,86.4 136,81.9 v135.6,81.9 | v125.2,72.7 v128.8,72.7 | v98.1,64.2 v103.1,64.2 | v103.1,64.2 103.2,64.2 | v103.1,64.2 104.1,64.2 105.2,63.2 105.2,58.9 | v107.4,74.7 107.4,74.8 v110.1,77.5 | v91.1,72.6 v94.7,72.6
  Route15 0.406: v135.7,49.2 135.7,70.9 v135.5,71.1 | v135.7,47.2 135,47.2 134.4,47.8 134.4,70.2 v133.5,71.1 | 135.8,49.2 137.5,49.2 137.8,49.5 151.2,49.5 v152.5,50.8 | v136.6,45.4 136.6,46.3 137.2,46.9 144.6,46.9 145.6,47.9 152.6,47.9
  other vias: 102.45,27.3 74.9,79.4 74.9,85.7 105.2,59 152.5,47.9
  pour Top: 0.1,118.2 0.1,0.7 158.3,0.7 158.3,118.2
GYRO_PWR
  Route2 0.305: GYRO.2 139.98,25.19 126.99,25.19 120.14,32.03 108.69,32.03 100.72,40 98.91,40 97.79,41.11 ARD_8.5
HEATER_1_PWR  (via drill 0.51)
  Top 0.406: v125.87,9.24 125.87,14.01 135.09,23.23 | 135.09,23.23 138.58,26.72 138.58,28.26 139.42,29.1 142.91,29.1 145.57,26.45 C3_CMD.8 | v126.71,28.96 131.46,24.21 134.11,24.21 135.09,23.23
  Bottom 0.406: v125.87,9.24 125.31,8.69 125.31,7.71 PO4.1 | v126.71,28.96 126.71,34.69 125.59,35.8 122.52,35.8 H1.1
HEATER_1_PWR_RTN  (via drill 0.51)
  Top 0.406: v139,90.15 145.15,84 146.27,84 147.66,82.6 148.78,82.6 150.04,81.35 150.04,46.14 148.22,44.33 C3_CMD.9
  Route15 0.406: H1.2 122.52,33.43 137.05,33.43 145.15,41.53 146.27,41.53 148.08,43.35 148.08,44.19 C3_CMD.9
  Bottom 0.406: v139,90.15 138.72,90.43 129.08,90.43 Q4.C
HEATER_2_PWR  (via drill 0.51 layers 15-16)
  Route15 0.406: v124.51,3.27 124.47,9.16 121.12,12.11 121.12,28.4 122.66,29.94 130.9,29.94 H2.1
  Bottom 0.406: H2.1 131.04,29.94 133.55,29.94 145.15,41.53 148.08,41.53 C3_CMD.10 | v124.51,3.27 125.17,4.79 PO5.1
HEATER_2_PWR_RTN  (via drill 0.51)
  Top 0.406: v139.7,70.17 139.7,66.82 143.75,62.77 143.75,42.93 145.15,41.53 146.13,41.53 148.08,39.58 148.08,38.88 C3_CMD.11
  Bottom 0.406: H2.2 131.04,27.42 133.83,27.42 145.15,38.74 148.08,38.74 C3_CMD.11 | v139.7,70.17 138.16,70.17 129.5,78.83 129.08,78.83 Q5.C
HEATER_CONTROL_1  (via drill 0.51, 0.51 layers 1-2)  (2 unrouted)
  Top 0.305: 131.04,86.19 131.04,88.47 130.44,89.27 127.71,89.27 125.87,90.71 115.53,90.71 112.74,87.91 111.9,87.91 110.5,89.31 v110.36,89.31 | 135.93,87.35 R10.2 | 131.04,86.17 132.24,84.97
  Top 0.406: v135.3,84.9 136,85.6 R10.2
  Route2 0.406: 135.2,85 v135.3,84.9 132.3,84.9 v132.2,85
  Route15 0.305: v110.36,89.31 109.25,88.19 87.59,88.19 79.91,80.51 69.57,80.51 40.51,51.45 ARD_7.10
HEATER_CONTROL_2
  Top 0.305: R11.2 136.07,74.5 137.19,75.62 137.19,90.15 131.88,95.46 82.56,95.46 72.64,85.54 72.64,83.02 69.57,79.95 64.54,79.95 50.85,66.26 50.85,51.45 ARD_6.3
LOAD_IN  (via drill 0.51)
  Top 0.406: LCC.6 107.01,50.19 107.01,50.61 113.44,57.04 113.44,59.27 D1.C | v116.23,57.74 117.63,59.13 121.96,59.13 D2.C
  Bottom 0.406: v116.23,57.74 115.11,57.74 113.58,59.27 D1.C
MISO
  Bottom 0.305: ARD_7.6 54.34,27.28 64.12,27.28 65.38,26.03 66.08,26.03 ARD_4.1
MOSI
  Bottom 0.305: ARD_4.4 55.6,28.54 32.83,51.31 ARD_7.7
N$15
  Top 0.305: 90.11,64.3 90.11,65.98 R4.1 | 90.11,64.3 90.11,63.61 R6.2 | 90.11,64.3 95.28,64.3 T2.2
N$16
  Top 0.305: 75.58,64.16 75.58,65.98 R1.1 | 75.58,64.16 75.58,63.61 R2.2 | 75.58,64.16 80.61,64.16 T1.2
N$18
  Top 0.305: R10.1 135.93,89.45 133.13,89.45 R12.2 132.99,89.45 132.57,89.45 129.08,92.94 Q4.B
N$19
  Top 0.305: R6.1 90.11,61.65 93.32,61.65 93.88,62.21 T2.3 94.16,62.35 95.42,61.09 96.95,61.09 97.37,61.51 99.89,61.51 R8.2
  Bottom 0.305: Q2.B 94.3,67.1 94.3,64.86 94.02,64.58 94.02,62.35 T2.3
N$22
  Top 0.305: R11.1 135.93,76.46 133.13,76.46 R13.2 133.13,76.6 133.13,77.29 129.08,81.35 Q5.B
N$23
  Top 0.305: R2.1 75.58,61.65 78.93,61.65 79.35,62.07 T1.3 79.49,62.07 80.61,60.95 82.42,60.95 82.98,61.51 85.5,61.51 R3.2
  Bottom 0.305: Q1.B 80.05,67.1 80.05,65 79.49,64.44 79.49,62.21 T1.3
N$24
  Top 0.305: R16.1 91.92,87.63 91.08,87.63 89.13,89.59 R18.2 88.85,89.59 85.78,92.66 83.54,92.66 Q6.B
N$26
  Top 0.305: R5.1 111.34,94.2 111.34,91.82 R7.2 111.48,91.68 111.48,90.01 112.32,89.17 T3.2
N$27
  Top 0.305: 109.39,87.07 111.06,87.07 T3.3 111.06,86.93 111.62,86.38 111.62,81.07 Q3.B | 109.39,87.07 108.41,87.07 R9.2 | 109.39,87.07 109.39,91.68 R7.1
N$29  (via drill 0.51 layers 15-16)
  Route15 0.406: v77.67,76.32 79.35,74.64 83.96,74.64 91.08,81.77 93.6,81.77 120.84,54.52 120.84,46.14 122.38,44.61 122.38,43.91 B1.5
  Bottom 0.406: v77.67,76.32 65.24,76.32 60.07,81.49 50.57,81.49 B1_CELL_1.1
N$31
  Top 0.305: R17.1 91.92,77.71 89.13,77.71 R19.2 88.85,77.57 87.03,77.57 83.54,81.07 Q7.B
N$33  (via drill 0.51)
  Top 0.406: v113.16,38.88 113.16,39.44 111.76,40.83 v111.76,43.21
  Bottom 0.406: v113.16,38.88 115.39,38.88 116.93,40.41 116.93,40.83 122.38,46.28 B1.4 | v111.76,43.21 105.19,49.77 105.19,52.99 101.56,56.62 78.09,56.62 76.14,54.66 65.1,54.66 55.18,64.58 41.49,64.58 38.42,67.66 B1_CELL_2.1
N$34
  Bottom 0.406: B2.3 114.14,48.8 116.09,46.84 116.09,40.69 115.25,39.86 112.74,39.86 104.36,48.24 104.36,52.71 101.28,55.78 78.37,55.78 76.42,53.83 64.82,53.83 54.9,63.74 37.72,63.74 22.35,79.11 22.35,98.11 20.54,99.93 B3_CELL_3.1
N$35
  Bottom 0.406: B2.4 114,46.42 112.88,47.54 112.74,47.54 108.41,51.87 108.41,63.33 102.4,69.33 101.42,69.33 101,69.75 99.61,69.75 82.98,86.38 82.14,86.38 81.44,87.07 81.44,89.45 80.05,90.85 65.1,90.85 63.42,89.17 35.48,89.17 32.55,86.24 B2_CELL_2.1
N$36  (via drill 0.51 layers 15-16)
  Route15 0.406: v100.03,70.73 100.86,70.73 108.27,63.33 108.27,62.35 112.46,58.16 112.46,46 114,44.47 114,43.91 B2.5
  Bottom 0.406: v100.03,70.73 100.03,71.01 85.64,85.4 85.64,93.22 79.63,99.23 45.26,99.23 44.56,99.93 B2_CELL_1.1
N$37
  Bottom 0.406: B1.3 122.38,48.94 121.68,48.94 114,56.62 112.88,56.62 109.25,60.25 109.25,63.61 102.68,70.17 101.98,70.17 86.47,85.68 86.47,93.5 79.91,100.07 49.03,100.07 45.96,103.14 42.89,103.14 26.54,86.79 26.54,81.63 B1_CELL_3.1
PYRO_1_PWR  (via drill 0.51)
  Top 0.406: v125.17,34.83 125.17,40.13 130.9,45.86 PYRO1.1
  Route15 0.406: C3_CMD.1 145.57,45.58 145.57,44.61 144.17,43.21 144.17,42.51 140.96,39.3 137.6,39.3 131.04,45.86 PYRO1.1
  Bottom 0.406: v125.17,34.83 125.17,20.3 131.74,13.73 131.74,10.5 PO1.1
PYRO_1_PWR_RTN  (via drill 0.51)
  Top 0.406: T1.1 82,62.21 82,66.4 82.7,67.1 Q1.C | v132.99,41.25 131.04,43.21 PYRO1.2
  Route15 0.406: T1.1 82,62.07 83.54,62.07 96.39,49.22 96.39,43.35 97.23,42.51 110.92,42.51 113.58,39.86 127.55,39.86 130.9,43.21 PYRO1.2
  Bottom 0.406: v132.99,41.25 137.05,41.25 139,39.3 141.8,39.3 145.29,42.79 145.57,42.79 C3_CMD.2
PYRO_2_PWR  (via drill 0.51 layers 15-16)  (2 unrouted)
  Top 0.406: PYRO2.1 131.04,37.9 143.47,37.9 145.57,40 C3_CMD.3
  Route15 0.406: v131.2,6.4 132.9,6.4 136.4,9.8 136.4,26.6 139.9,30.1 141.8,30.1 142.8,29.1 142.8,25.2 144.8,23.2 149.2,23.2 152.5,26.5 152.5,38.4 150.7,40.2 145.7,40.2 145.6,40.1
  Bottom 0.406: v131.2,6.4 131.1,6.9 131.8,7.6
PYRO_2_PWR_RTN
  Top 0.406: T2.1 96.67,62.35 96.67,66.96 96.81,67.1 Q2.C | PYRO2.2 131.04,35.38 143.47,35.38 145.57,37.48 C3_CMD.4
  Route2 0.406: T2.1 96.67,62.21 96.67,59.55 105.61,50.61 105.61,47.82 116.23,37.2 129.08,37.2 130.9,35.38 PYRO2.2
RESET  (via drill 0.51, 0.51 layers 15-16)
  Top 0.305: v67.33,27.56 66.92,27.56 66.64,27.28 61.47,27.28 39.26,5.07 v37.44,5.07
  Route15 0.305: v102.42,32.31 67.33,32.31 66.22,31.19 ARD_4.5
  Bottom 0.305: v67.33,27.56 67.33,29.1 66.22,30.22 66.22,31.05 ARD_4.5 | v37.44,5.07 35.62,3.25 ARD_1.3 | v102.42,32.31 107.61,37.9 128.1,37.9 133.27,43.07 140.4,43.07 ON/OFF.9
RX0
  Top 0.305: X12.2 11.87,36.5 48.62,36.5 63.42,51.31 ARD_6.8
RX1  (via drill 0.51)
  Route2 0.305: v95,29.52 97.23,27.28 98.21,27.28 99.05,26.45 99.05,25.61 100.03,24.63 100.86,24.63 106.31,19.18 106.31,18.06 107.43,16.95 GPS.5
  Bottom 0.305: v95,29.52 81.31,43.21 81.31,51.31 ARD_5.6
RX3  (via drill 0.51)
  Top 0.305: v43.59,55.78 38.42,60.95 RB1.2
  Bottom 0.305: v43.59,55.78 61.05,55.78 66.78,50.05 69.15,50.05 70.41,51.31 71.11,51.31 ARD_5.2
S/A_PWR_IN
  Top 0.406: C2_PWR.8 145.71,66.26 145.71,67.1 146.96,68.35 146.96,69.61 145.71,70.87 145.71,71.57 C2_PWR.6 145.71,71.85 145.71,72.41 146.96,73.66 146.96,74.92 146.82,75.06 146.82,76.32 146.96,76.46 146.96,77.71 146.82,77.85 146.82,78.97 148.08,80.23 148.08,81.21 C2_PWR.10
  Bottom 0.406: SACC.6 125.59,76.46 126.29,76.46 137.19,65.56 141.94,65.56 142.07,65.42 142.49,65.42 142.63,65.28 144.73,65.28 145.57,66.12 C2_PWR.8
S/A_PWR_OUT
  Top 0.406: MPPT.3 130.9,54.94 126.99,58.86 126.99,77.71 125.59,79.11 SACC.5
S/A_PWR_RTN  (via drill 0.51)
  Top 0.406: v137.6,66.68 131.04,60.11 131.04,57.46 MPPT.4
  Bottom 0.406: C2_PWR.9 148.22,84 149.48,82.74 149.48,80.65 148.22,79.39 148.22,78.55 C2_PWR.11 148.08,78.41 148.08,77.71 146.13,75.76 145.15,75.76 144.31,74.92 144.31,71.01 144.17,70.87 | v137.6,66.68 141.8,70.87 144.17,70.87 | 144.17,70.87 145.57,69.47 145.57,69.05 C2_PWR.7
SCK
  Bottom 0.305: ARD_4.3 65.38,28.54 64.12,29.8 63.14,29.8 41.77,51.17 41.77,51.87 40.93,52.71 29.06,52.71 27.8,51.45 ARD_7.5
SCL  (via drill 0.51)
  Top 0.305: GYRO.4 139.98,19.88 139.98,19.32 133.41,12.75 133.41,12.2 126.99,7.57 121.82,7.57 115.95,11.64 115.95,28.82 104.78,40 104.78,55.5 106.87,57.6 LCC.3 | v95,60.25 86.47,51.73 86.47,51.45 ARD_5.8 | v99.33,84.56 98.21,84.56 93.46,79.81 88.43,79.81 83.96,84.28 79.49,84.28 B1CC.3
  Bottom 0.305: SACC.3 125.45,84.28 125.31,84.42 102.68,84.42 B2CC.3 102.4,84.42 99.47,84.42 v99.33,84.56 | 99.95,64.09 106.31,57.74 106.87,57.74 LCC.3 | 99.95,64.09 98.21,65.84 98.21,68.91 84.8,82.32 84.38,82.32 82.42,84.28 79.49,84.28 B1CC.3 | v95,60.25 96.11,60.25 99.95,64.09
SDA  (via drill 0.51)
  Top 0.305: v90.11,57.74 83.82,51.45 ARD_5.7
  Route2 0.305: GYRO.3 140.12,22.67 140.12,23.51 141.24,24.63 141.24,26.03 140.96,26.3 140.96,26.86 141.24,27.14 141.24,29.38 125.59,45.02 119.58,45.02 114.41,50.19 111.9,50.19 107.01,55.08 LCC.4 | B2CC.4 102.54,82.04 84.24,82.04 83.96,82.32 79.91,82.32 79.49,81.91 B1CC.4
  Bottom 0.305: SACC.4 125.45,81.77 118.47,81.77 117.21,83.02 103.66,83.02 102.68,82.04 B2CC.4 | LCC.4 106.87,55.22 104.36,57.74 v90.11,57.74 90.11,64.72 81.44,73.38 81.44,79.25 79.49,81.21 79.49,81.77 B1CC.4
SPARE_1_PWR  (via drill 0.51)  (4 unrouted)
  Top 0.406: v127.33,20.44 122.42,20.44 SPRL1.1 | 119.2,11 119.2,20.4 122.5,20.4
  Bottom 0.406: v127.33,20.44 128.38,20.44 143.89,35.94 148.08,35.94 C3_CMD.12 | 119.2,11.1 119.2,8.8 118.6,8.2 118.6,7.6
  other vias: 119.17,11.05
SPARE_1_PWR_RTN  (via drill 0.51)
  Top 0.406: v101.98,94.34 82.42,94.34 81.44,93.36 81.44,92.24 83.4,90.29 Q6.C | v133.69,23.23 128.38,17.92 122.52,17.92 SPRL1.2
  Bottom 0.406: v101.98,94.34 140.68,94.34 148.92,86.1 149.06,86.1 151.16,84 151.16,35.94 148.5,33.29 148.22,33.29 C3_CMD.13 148.08,33.15 148.08,32.45 146.13,30.5 140.82,30.5 138.58,28.26 138.58,28.12 v133.69,23.23
SPARE_2_PWR  (via drill 0.51, 0.51 layers 15-16)
  Top 0.406: v132.74,31.33 144.31,31.33 145.15,30.5 148.08,30.5 C3_CMD.14
  Route15 0.406: v117.81,3.09 118.2,33.43 114.14,35.8 SPRL2.1
  Bottom 0.406: v132.74,31.33 126.07,37.2 121.26,37.2 120,35.94 114.14,35.94 SPRL2.1 | v117.81,3.09 118.61,4.79 PO7.1
SPARE_2_PWR_RTN  (via drill 0.51)
  Top 0.406: C3_CMD.15 148.22,27.84 148.22,28.68 149.62,30.08 149.62,33.71 148.64,34.69 147.52,34.69 146.27,35.94 145.15,35.94 142.49,33.29 126.15,33.29 124.05,31.19 116.23,31.19 114.14,33.29 SPRL2.2
  Route2 0.406: v96.11,58.72 96.25,58.72 99.89,55.08 99.89,54.66 99.75,54.52 99.75,53.69 100.72,52.71 102.26,52.71 104.78,50.19 104.78,42.79 114.14,33.43 SPRL2.2
  Bottom 0.406: v96.11,58.72 95.14,58.72 92.76,61.09 92.76,69.33 83.54,78.55 Q7.C
SPARE_HIGH_1_CONTROL  (via drill 0.51)
  Top 0.305: v100.72,54.11 101.14,54.52 101.14,64.3 100.86,64.58 99.47,64.58 98.21,65.84 98.21,68.35 97.37,69.19 96.53,69.19 90.81,74.92 90.81,76.32 91.08,76.6 95,76.6 100.31,81.91 100.31,89.17 105.33,94.2 109.25,94.2 R5.2
  Bottom 0.305: v100.72,54.11 100.72,52.85 101.7,51.87 101.7,50.19 100.44,48.94 ARD_9.2
SPARE_HIGH_1_PWR  (via drill 0.51)
  Top 0.406: SPRH1.1 122.52,27.98 124.33,27.98 128.8,32.45 143.47,32.45 145.57,34.55 C3_CMD.5
  Route2 0.406: v133.69,20.02 129.22,24.49 125.87,24.49 122.52,27.84 SPRH1.1
  Bottom 0.406: v133.69,20.02 135.37,18.34 135.37,2.7 134.95,2.28 133.27,2.28 131.88,3.67 131.88,4.79 PO3.1
SPARE_HIGH_1_PWR_RTN  (via drill 0.51)
  Top 0.406: T3.1 113.72,87.07 113.72,81.49 114.14,81.07 Q3.C
  Route2 0.406: v128.8,64.3 128.8,63.61 130.48,61.93 131.32,61.93 139,54.25 139,38.6 145.57,32.03 C3_CMD.6
  Route15 0.406: SPRH1.2 122.52,25.47 132.53,25.47 139.05,31.89 145.57,31.89 C3_CMD.6
  Bottom 0.406: v128.8,64.3 128.66,64.3 114.28,78.69 114.28,80.93 Q3.C
SPARE_LOW_1_CONTROL  (via drill 0.51)
  Top 0.305: v93.18,80.79 93.18,88.47 92.06,89.59 R16.2
  Route15 0.305: v93.18,80.79 93.18,72.68 98.21,67.66 98.21,52.71 99.05,51.87 99.05,47.68 100.31,46.42 ARD_9.3
SPARE_LOW_2_CONTROL
  Top 0.305: R17.2 92.06,75.48 93.6,75.48 101.7,67.38 101.7,45.16 100.44,43.91 ARD_9.4
TEMP_EXT_1  (via drill 0.51)
  Top 0.305: R22.1 68.03,19.6 68.03,16.67 R23.2 68.03,16.53 v69.43,15.13
  Route2 0.305: v69.43,15.13 62.31,22.25 62.31,94.76 54.06,103 54.06,104.12 52.25,105.93 51.27,105.93 C1_TLM.1
  Bottom 0.305: v69.43,15.13 69.43,4.93 71.11,3.25 ARD_2.8
TEMP_EXT_2  (via drill 0.51 layers 1-2)
  Top 0.305: ARD_2.6 66.08,3.25 70.41,7.58 70.41,14.99 71.94,16.53 R25.2 72.08,16.67 72.08,19.6 R24.1 71.94,19.74 70.97,20.72 v70.55,20.72
  Route2 0.305: v70.55,20.72 69.85,21.42 69.85,88.33 54.62,103.56 54.62,104.68 55.88,105.93 56.58,105.93 C1_TLM.3
TX0
  Top 0.305: X12.3 11.87,38.6 48.2,38.6 60.91,51.31 ARD_6.7
TX1  (via drill 0.51)
  Top 0.305: v105.47,37.76 105.47,16.39 107.43,14.43 GPS.4
  Bottom 0.305: v105.47,37.76 103.66,39.58 103.66,52.43 101,55.08 83.12,55.08 79.49,51.45 78.79,51.45 ARD_5.5
TX3
  Bottom 0.305: ARD_5.1 68.45,51.45 66.22,51.45 57.98,59.69 37.16,59.69 35.9,60.95 RB1.3
VIN  (via drill 0.51)
  Top 0.406: R14.2 58.95,14.99 58.95,13.87 48.34,3.25 ARD_1.8 | v109.25,36.92 105.47,40.69 105.47,50.61 106.87,52.01 106.87,52.57 LCC.5
  Route2 0.406: v103.66,4.37 101.98,6.05 99.19,6.05 95,1.86 50.57,1.86 49.31,3.12 48.34,3.12 ARD_1.8
  Bottom 0.406: PVIN3.1 129.5,4.22 129.5,6.87 PVIN2.1 129.5,7.15 129.5,9.66 PVIN1.1 129.36,9.8 127.83,9.8 127.41,10.22 127.41,13.12 123.04,13.14 | PVIN7.1 116.37,4.22 116.37,6.87 PVIN6.1 | PVIN5.1 PVIN4.1 123.04,13.14 | 118.23,13.84 116.37,7.99 116.37,7.15 PVIN6.1 | 118.23,13.84 121.84,13.84 123.04,13.14 | v109.25,36.92 109.25,35.38 118.79,25.75 118.69,14.88 118.23,13.84 | v103.66,4.37 114.23,4.37 PVIN6.1
VIN_VOLTAGE_TLM
  Top 0.305: R15.2 61.05,18.48 61.05,15.13 R14.1 61.05,14.99 61.05,10.66 C1.1 61.05,10.52 61.05,3.25 ARD_2.4

## Text on the board
bNames: VIN | B_EXT | VIN | B_EXT | VIN | B_EXT | P1 | P6 | P4 | P2 | GYRO | P7 | P5 | P3